# Altium PCB bot_board.PcbDoc
Units mm, origin at the board's own origin, x right, y up, seen from the top; angles counter-clockwise.
Board outline 109 x 70 mm, 4 copper layers (Top Layer, +12V, -12V, Bottom Layer), stack 0.603 mm thick; 25 components, 21 nets, 126 pads, 21 vias.
Unrouted connection lines stored in the file: 21.
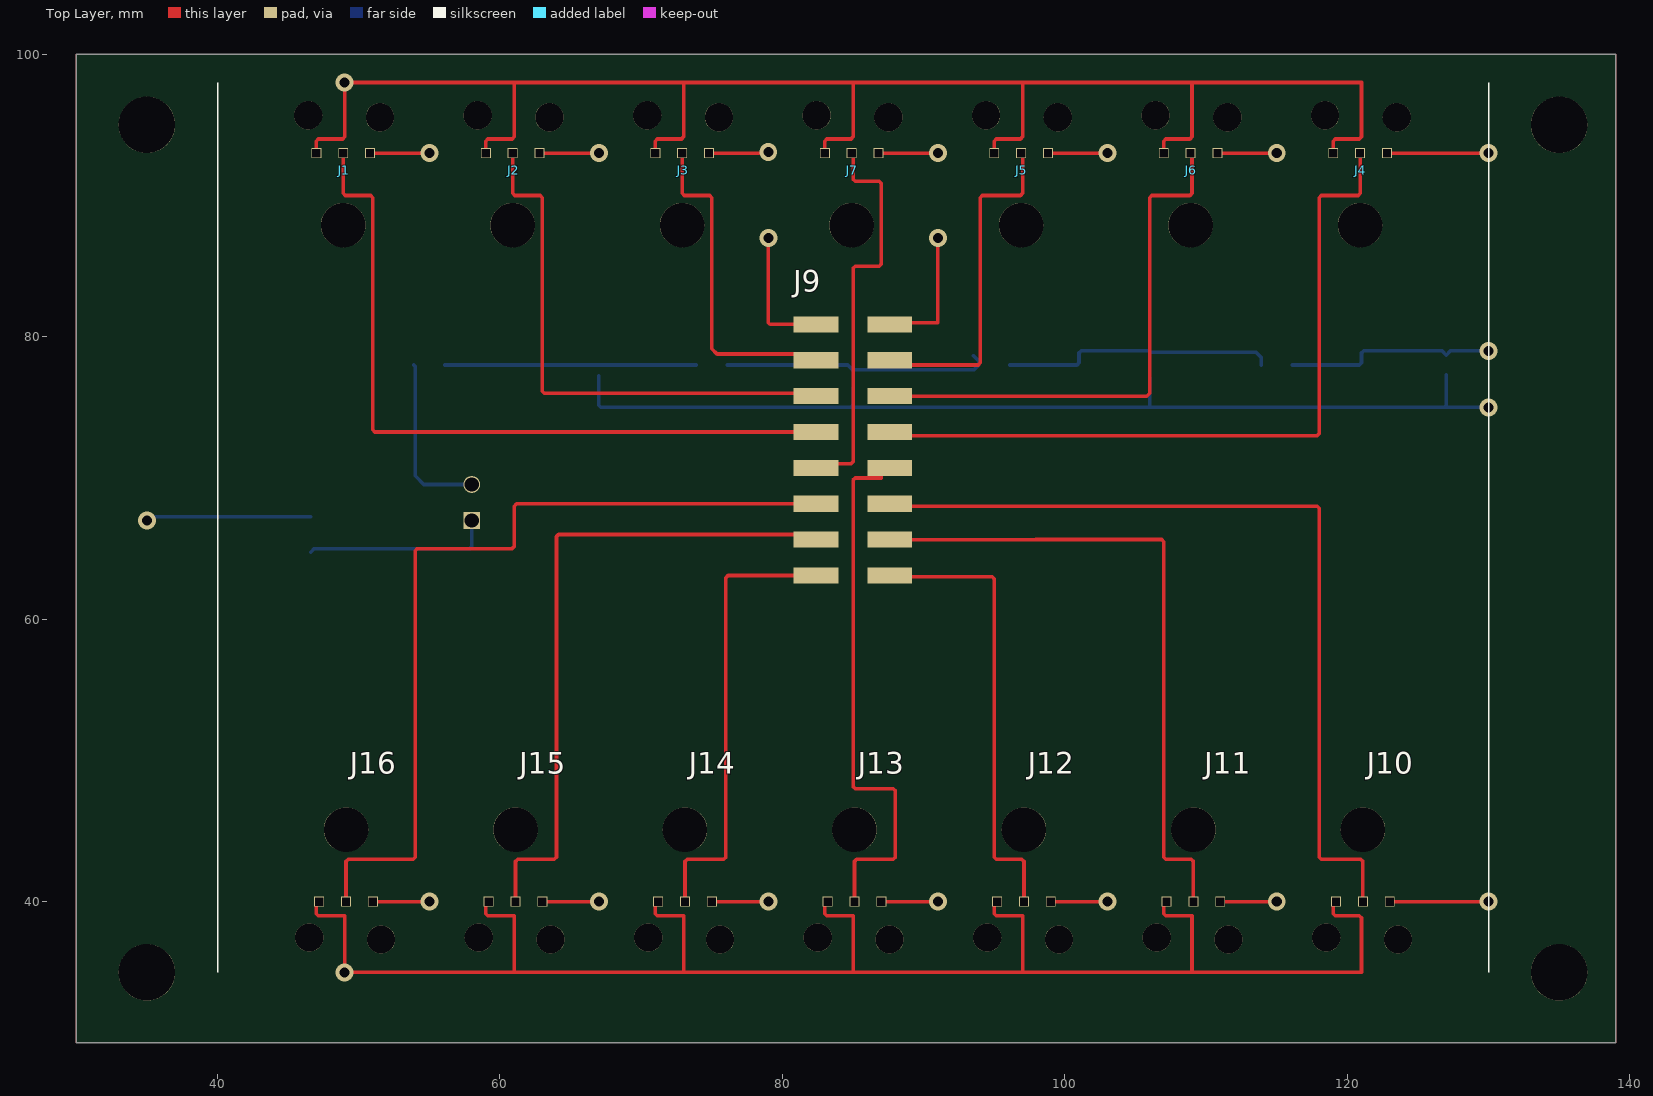
[diagram p0: Top Layer view]
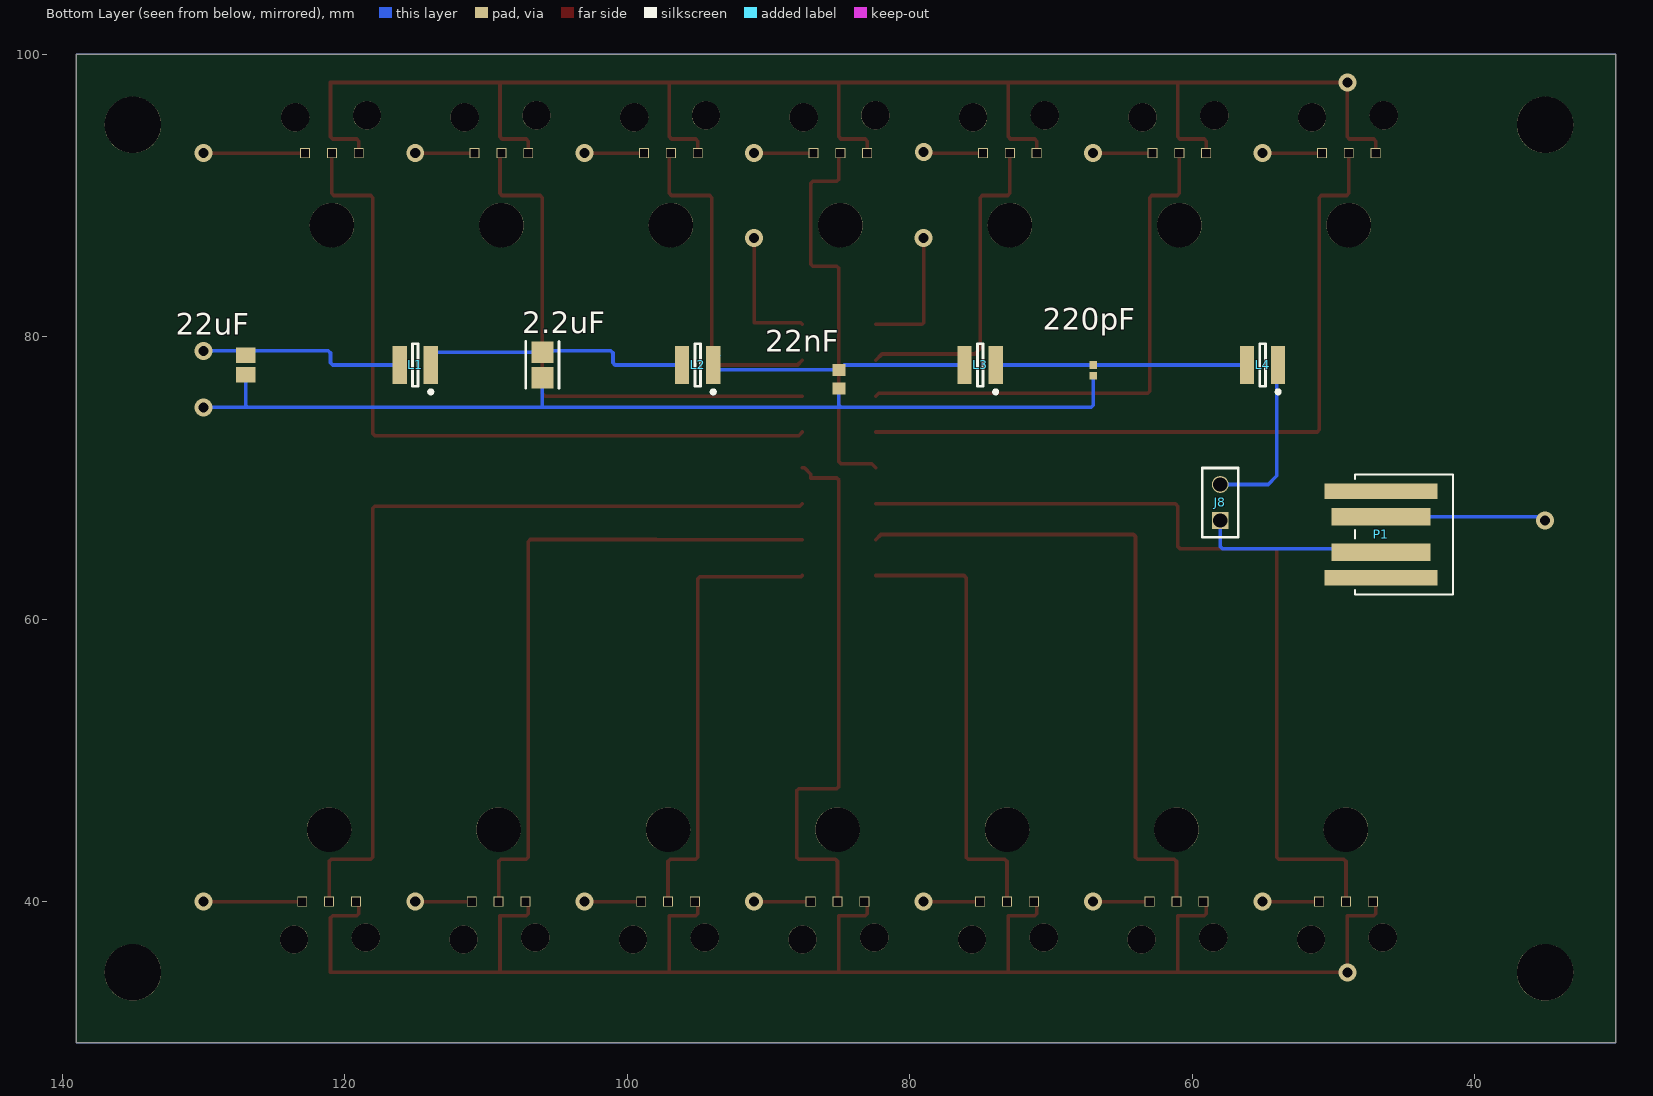
[diagram p1: Bottom Layer view, seen from below]
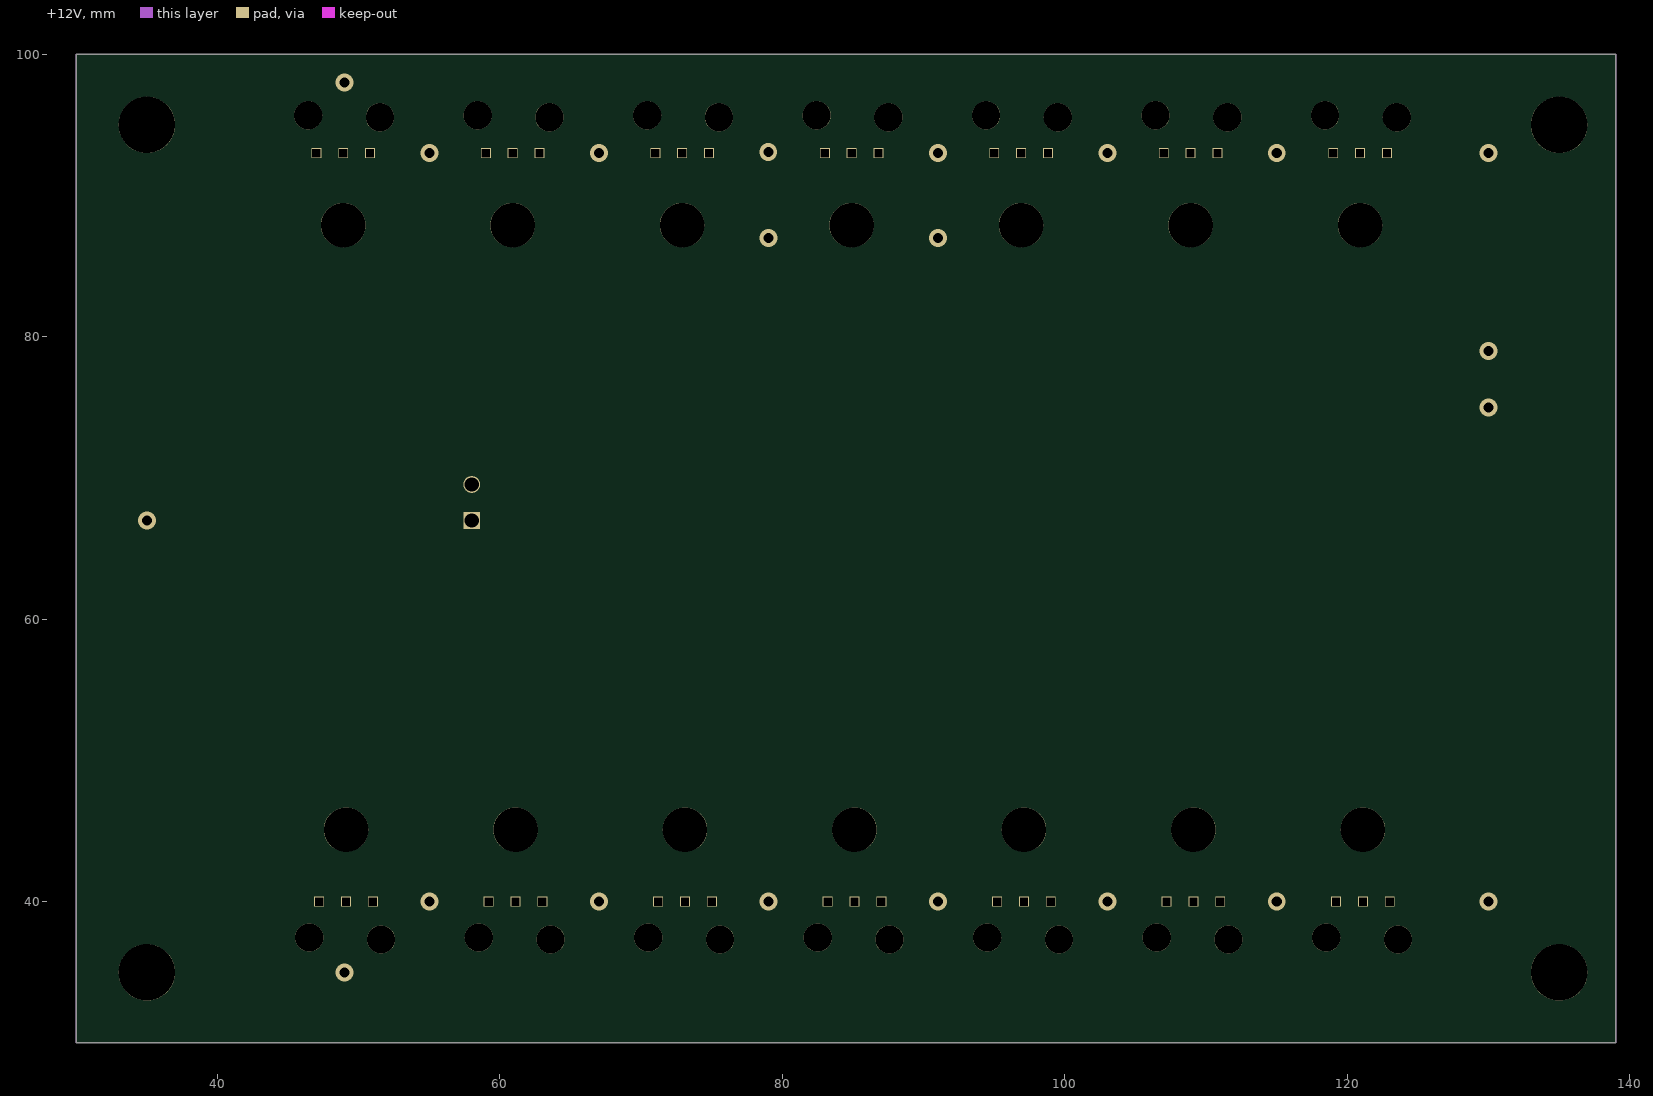
[diagram p2: +12V]
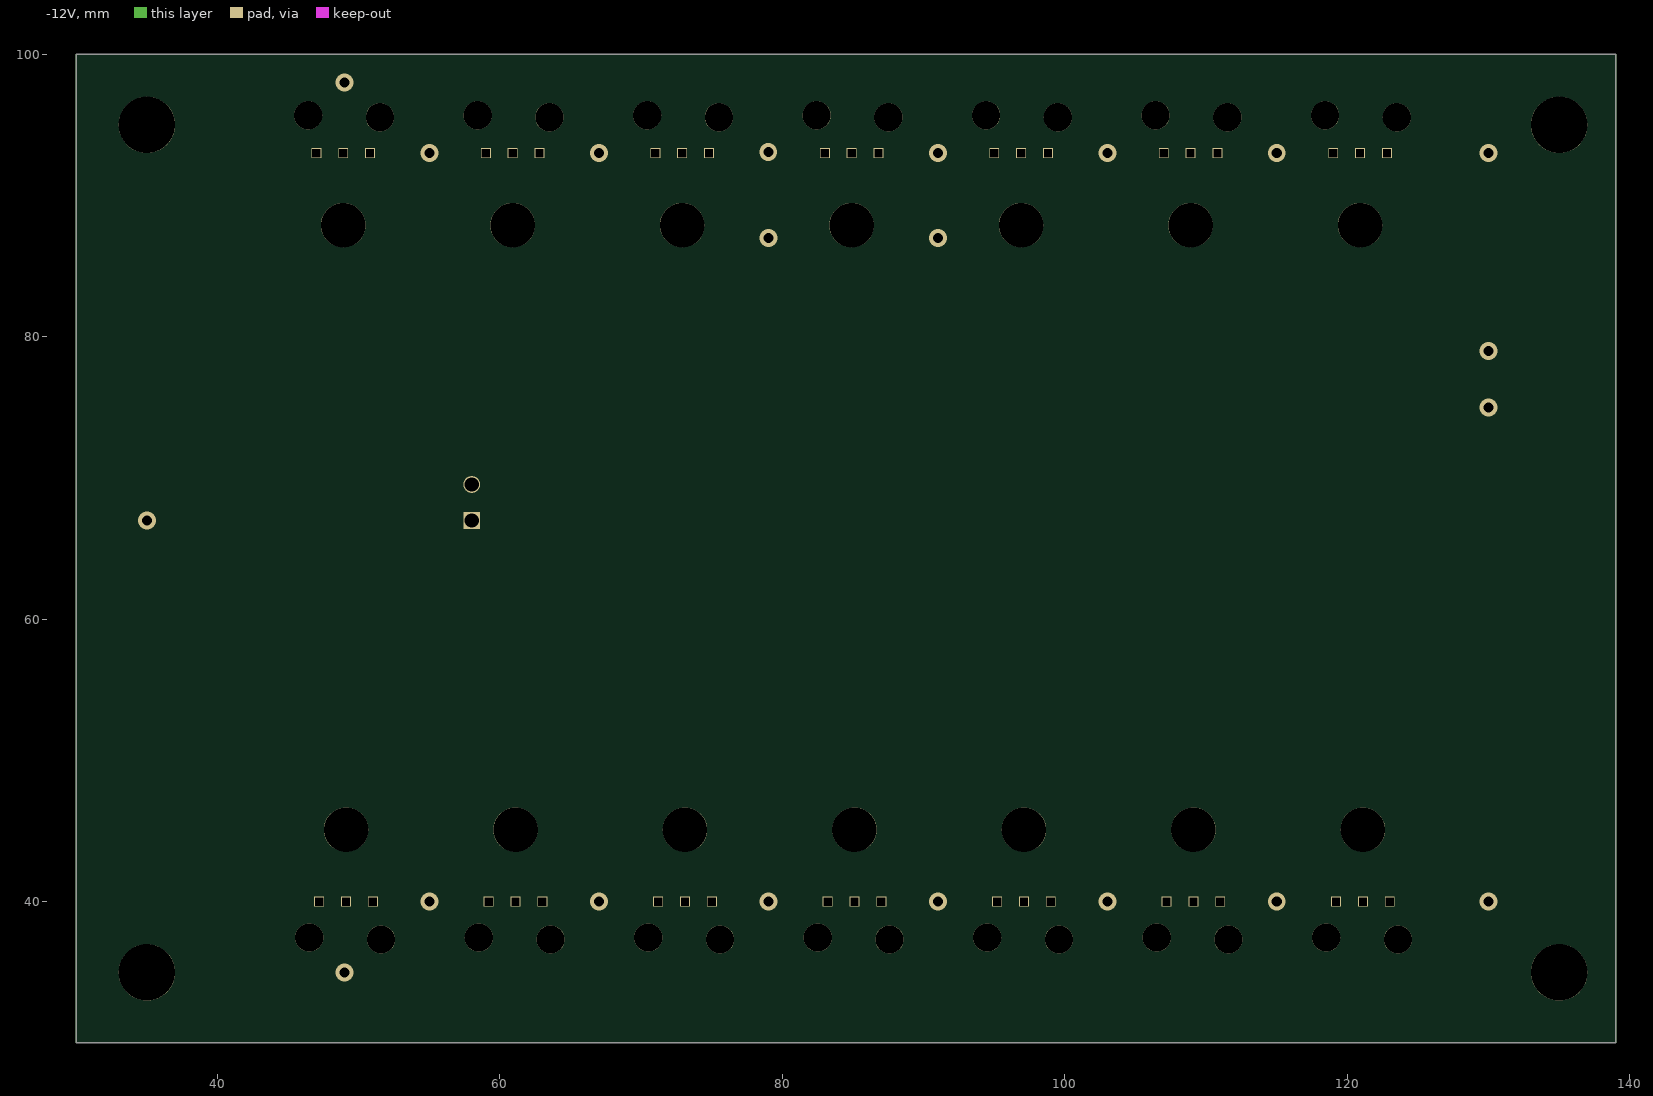
[diagram p3: -12V]
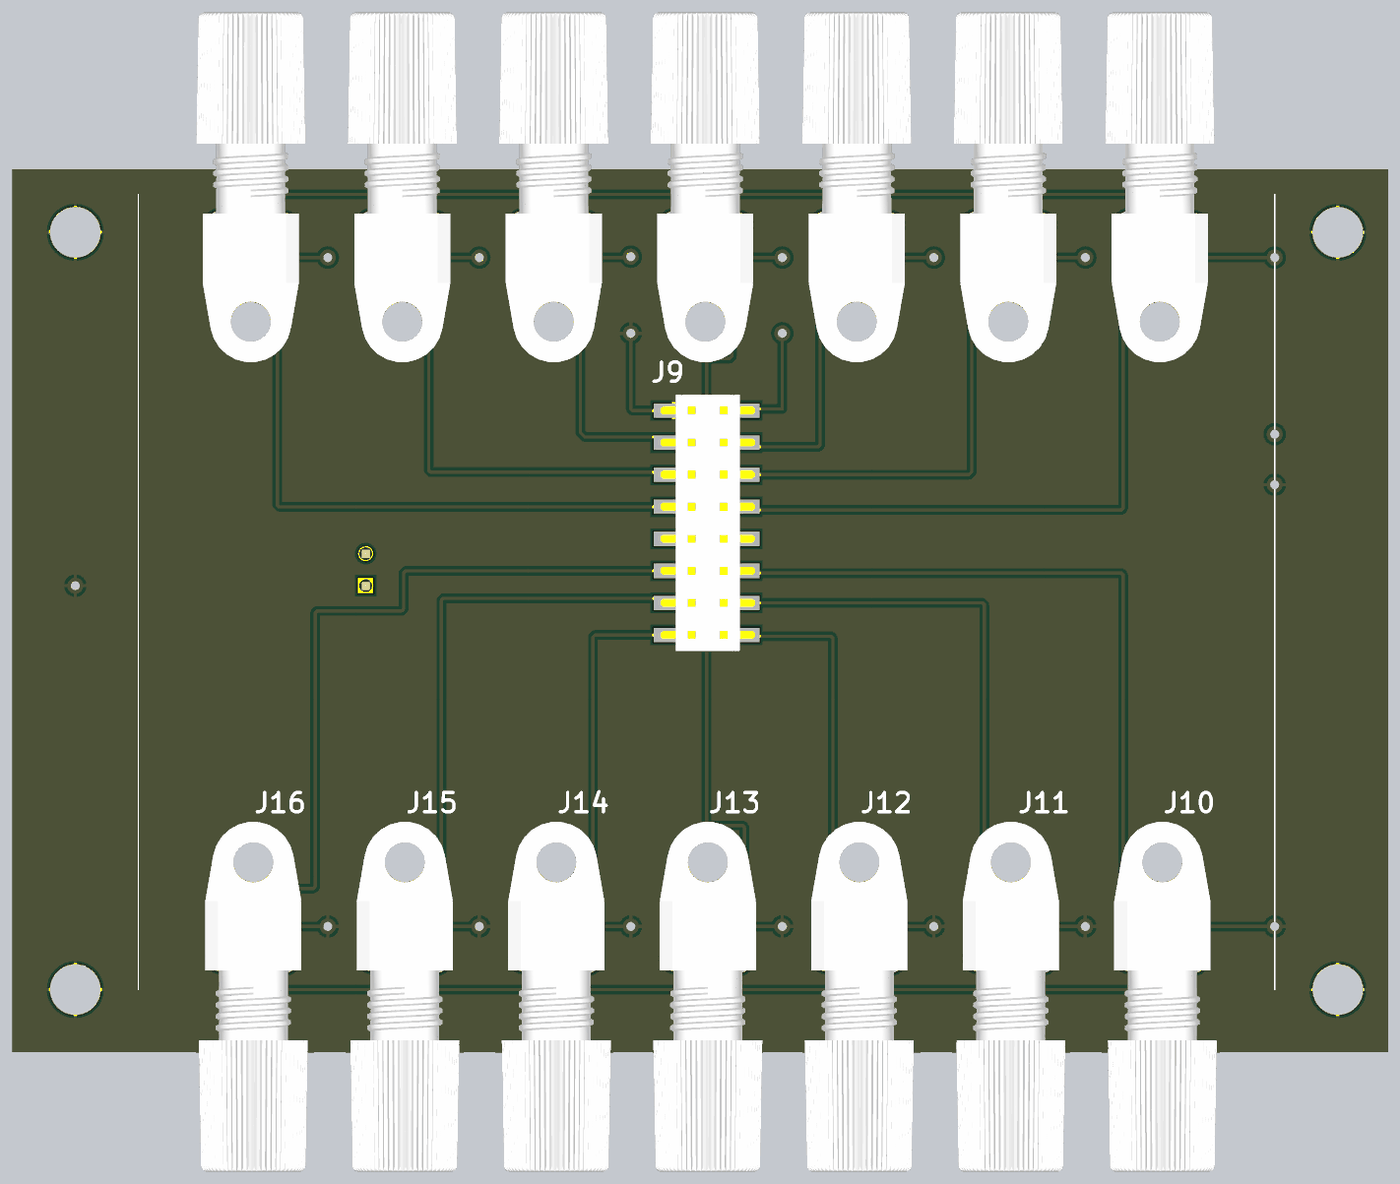
[diagram p4: 3D render of the assembled board from above, using the file's embedded part models]

## Layer stack, top to bottom
Top Solder: solder mask 0.0102, Solder Resist, Dk 3.5
Top Layer: signal copper 0.035
Dielectric 2: prepreg 0.0711, PP-006, Dk 4.1
+12V: signal copper 0.0356
Dielectric 1: dielectric 0.32, FR-4, Dk 4.8
-12V: signal copper 0.0356
Dielectric 3: prepreg 0.0711, PP-006, Dk 4.1
Bottom Layer: signal copper 0.035
Bottom Solder: solder mask 0.0102, Solder Resist, Dk 3.5

## Board outline
30,30 30,100 139,100 139,30

## Design rules (kind name [scope] priority, off if disabled: settings)
Clearance [All] p1: gap=0.254 ignorepadtopadclearanceinfootprint=FALSE except(0: Arc-Hole Track-Hole SMDPad-Hole THPad-Hole Via-Hole Fill-Hole Poly-Hole Region-Hole Text-Hole; 0.2: Arc-SMDPad Track-SMDPad SMDPad-SMDPad)
HoleSize [All] p1: absolutevalues=TRUE maxlimit=4 minlimit=0.025 maxpercent=80.000 minpercent=20.000
MinimumSolderMaskSliver [All] p1: minsoldermaskwidth=0.09
PolygonConnect [All] p1: connectstyle=Relief reliefconductorwidth=0.254 reliefentries=4 polygonreliefangle="90 Angle" airgapwidth=0.254
RoomDefinition bot_schem [InComponentClass('bot_schem')] p1: confinementstyle=ConfineIn formatcopy=TRUE lockcomponents=FALSE outline 30,17 139,17 139,117 30,117
RoutingVias [All] p1: holewidth=0.711 width=1.27 viastyle="Through Hole" minholewidth=0.711 minwidth=1.27 maxholewidth=0.711 maxwidth=1.27
SolderMaskExpansion [All] p1: expansion=0.102 istentingtop=FALSE
Width [All] p1: maxlimit=0.254 minlimit=0.254 preferedwidth=0.254
28 further rules are at their usual default settings.

## Components (designator, comment, footprint, x,y, rotation, side; value= is the part's Value field where it differs from the comment)
2.2uF "C0805C223K5RACTU" 22nF 106,78 r270 bottom (schematic designator 2.2nF)
22nF "C0603C225K4PACTU" 2.2uF 85,77 r270 bottom
22uF "C0805C226M9PACTU" 22uF 127,78 r270 bottom
220pF "C0402C221K5RACTU" 220pF 67,77.62 r270 bottom
J1 "IF-D95T" IF-D95 47,93 r0 top
J2 "IF-D95T" IF-D95 59,93 r0 top
J3 "IF-D95T" IF-D95 71,93 r0 top
J4 "IF-D95T" IF-D95 119,93 r0 top
J5 "IF-D95T" IF-D95 95,93 r0 top
J6 "IF-D95T" IF-D95 107,93 r0 top
J7 "IF-D95T" IF-D95 83,93 r0 top
J8 "PRPC001DFAN-RC" PRPC001DFAN-RC 58,67 r90 bottom
J9 "HW-08-10-F-D-457-SM" "16 PIN RECEIVER" 87.593,63.095 r90 top
J10 "IF-D95T" IF-D95 123,40 r180 top
J11 "IF-D95T" IF-D95 111,40 r180 top
J12 "IF-D95T" IF-D95 99,40 r180 top
J13 "IF-D95T" IF-D95 87,40 r180 top
J14 "IF-D95T" IF-D95 75,40 r180 top
J15 "IF-D95T" IF-D95 63,40 r180 top
J16 "IF-D95T" IF-D95 51,40 r180 top
L1 "SRN3015-1R0Y" 1uH 115,78 r0 bottom
L2 "SRN3015-1R0Y" 1uH 95,78 r0 bottom
L3 "SRN3015-1R0Y" 1uH 75,78 r0 bottom
L4 "SRN3015-1R0Y" 1uH 55,78 r0 bottom
P1 "1054311102" CONN_1054311102_MOL 45,66 r270 bottom

## Footprints (in the part's own frame and the unit in brackets; to place one, negate y for a bottom-side part, rotate by r counter-clockwise, add the part's x,y. Pads: shape width x height; smd on the part's side, far side on the other; paste and mask are expansions set on the pad)
1uH [mm]
  rect 1x2.7 smd: 1(-1.1,0) 2(1.1,0)
  silkscreen extent -1.22,-1.5 0.2,2.02, body extent -1.5,-1.5 1.5,1.5, height 1.5
2.2uF [mm]
  rect 0.85x0.9 smd: 1(-0.65,0) 2(0.65,0)
  body extent -0.88,-0.48 0.87,0.48, height 0.9
"16 PIN RECEIVER" [mm]
  rect 1.14x3.175 smd: 01(0,0) 02(0,5.205) 03(2.54,0) 04(2.54,5.205) 05(5.08,0) 06(5.08,5.205) 07(7.62,0) 08(7.62,5.205) 09(10.16,0) 10(10.16,5.205) 11(12.7,0) 12(12.7,5.205) 13(15.24,0) 14(15.24,5.205) 15(17.78,0) 16(17.78,5.205)
  body extent -1.26,-1.25 19.06,6.25, height 19.44
22nF [mm]
  rect 1.505x1.556 smd paste+0 mask+0: 1(-0.901,0) 2(0.901,0)
  silkscreen extent -1.65,-1.18 1.65,1.18, body extent -1,-0.63 1,0.62, height 0.88
22uF [mm]
  rect 1.1x1.35 smd: 1(-0.7,0) 2(0.7,0)
  body extent -1.1,-0.72 1.1,0.72, height 1.45
220pF [mm]
  rect 0.56x0.52 smd: 1(-0.38,0) 2(0.38,0)
  body extent -0.53,-0.28 0.53,0.28, height 0.6
CONN_1054311102_MOL [mil]
  rect 49x276 smd paste+0 mask+0: 1(49.21,-63.38) 2(-49.21,-63.38)
  rect 43x315 smd: 3(-120.28,-63.38) 4(120.28,-63.38)
  silkscreen extent -167,-137 167,137, body extent -162,-254 162,71, height 440
IF-D95 [mm]
  rect 0.7x0.7 hole 0.55 square: 1(0,0) 2(1.9,0) 3(3.8,0)
  round 2 hole 2: 4(-0.58,2.675) 4(4.5,2.54)
  round 3.15 hole 3.15: 4(1.9,-5.1)
  body extent -2.42,-8.3 6.22,19.44, height 11.3
PRPC001DFAN-RC [mm]
  rect 1.2x1.2 hole 1: 1(0,0)
  round 1.2 hole 1: 2(2.54,0)
  silkscreen extent -1.2,-1.27 3.7,1.27, body extent -1.29,-1.27 3.79,1.27, height 10.17

## Part data
2.2uF: "KEMET - C0805C223K5RACTU - CAP, MLCC, X7R, 22NF, 50V, 0805", Capacitance=22nF, Case Code (Imperial)=0805, Case Code (Metric)=2012, Dielectric=X7R, Dielectric Material=Ceramic, Manufacturer=KEMET, Max Operating Temperature=125°C, Min Operating Temperature=-55°C, Supplier Part Number 1=399-1163-1-ND, Tolerance=10%, Voltage=50V, Case/Package=0805, Category="Ceramic Capacitors", ComponentLink1Description=https://datasheet.ciiva.com/18193/getdatasheetpartid-385695-18193669.pdf?src-supplier=Verical, ComponentLink1URL=https://datasheet.ciiva.com/18193/getdatasheetpartid-385695-18193669.pdf?src-supplier=Verical, Construction=Flat, Depth=1.25mm, Height=0.78mm, Length=2mm, Manufacturer Part Number=C0805C223K5RACTU, Mount="Surface Mount,PCB", Packaging="Tape and Reel", Pricing 1="1=0.10000, 10=0.05200, 50=0.02840, 100=0.02320, 500=0.01656, 1000=0.01301 (USD)", Radiation Hardening=No, REACH SVHC="No SVHC", RoHS=Yes, RoHS Compliant=Yes, Series=C0805C, Stock 1=179680, Supplier 1=Digi-Key, Termination=SMD/SMT, Voltage Rating=50V, Voltage Rating (DC)=50V, Weight=0.000194oz, Width=1.2mm
22nF: "KEMET - C0603C225K4PACTU - CAP, MLCC, X5R, 2.2UF, 16V, 0603", Capacitance=2.2uF, Case Code (Imperial)=0603, Case Code (Metric)=1608, Dielectric=X5R, Dielectric Material=Ceramic, Manufacturer=KEMET, Max Operating Temperature=85°C, Min Operating Temperature=-55°C, Package Quantity=1, Supplier Part Number 1=399-7886-1-ND, Tolerance=10%, Voltage=16V, Case/Package=0603, Category="Ceramic Capacitors", ComponentLink1Description=https://datasheet.ciiva.com/5969/1776083-5969304.pdf?src-supplier=Farnell, ComponentLink1URL=https://datasheet.ciiva.com/5969/1776083-5969304.pdf?src-supplier=Farnell, ComponentLink2Description=https://datasheet.ciiva.com/7823/1776083-7823706.pdf?src-supplier=Element14, ComponentLink2URL=https://datasheet.ciiva.com/7823/1776083-7823706.pdf?src-supplier=Element14, Construction=Flat, Contact Plating=Tin,Matte, Depth=0.8mm, Dissipation Factor=5%, Height=0.8mm, Lead Free="Lead Free", Length=1.6mm, Manufacturer Part Number=C0603C225K4PACTU, Mount="Surface Mount", Number of Pins=2, Packaging="Tape and Reel", Pricing 1="1=0.13000, 10=0.09000, 50=0.05080, 100=0.04210, 500=0.02952, 1000=0.02444 (USD)", Radiation Hardening=No, REACH SVHC="No SVHC", RoHS=Yes, RoHS Compliant=Yes, Series=C, Stock 1=161677, Supplier 1=Digi-Key, Termination=SMD/SMT, Thickness=0.034inch, Voltage Rating=16V, Voltage Rating (DC)=16V, Width=0.8mm
22uF: "KEMET         C0805C226M9PACTU            CERAMIC CAPACITOR, 22UF, 6.3V, X5R, 20%, 0805, FULL REEL", Capacitance=22uF, Case Code (Imperial)=0805, Case Code (Metric)=2012, Dielectric=X5R, Dielectric Material=Ceramic, Manufacturer=KEMET, Max Operating Temperature=85°C, Min Operating Temperature=-55°C, Package Quantity=2500, Supplier Part Number 1=399-4696-1-ND, Tolerance=20%, Voltage=6.3V, Case/Package=0805, Category="Ceramic Capacitors", ComponentLink1Description=https://datasheet.ciiva.com/7842/40889-7842585.pdf?src-supplier=Element14, ComponentLink1URL=https://datasheet.ciiva.com/7842/40889-7842585.pdf?src-supplier=Element14, ComponentLink2Description=https://datasheet.ciiva.com/18193/getdatasheetpartid-344134-18193702.pdf?src-supplier=Verical, ComponentLink2URL=https://datasheet.ciiva.com/18193/getdatasheetpartid-344134-18193702.pdf?src-supplier=Verical, ComponentLink3Description=https://datasheet.ciiva.com/22748/1918694-22748303.pdf?src-supplier=Element14, ComponentLink3URL=https://datasheet.ciiva.com/22748/1918694-22748303.pdf?src-supplier=Element14, Construction=Flat, Depth=1.25mm, Dissipation Factor=5%, Height=1.25mm, Lead Free="Lead Free", Length=2mm, Manufacturer Part Number=C0805C226M9PACTU, Mount="Surface Mount,PCB", Number of Pins=2, Packaging="Tape and Reel", Pricing 1="1=0.21000, 10=0.14400, 50=0.08660, 100=0.07320, 500=0.05004, 1000=0.04428 (USD)", Radiation Hardening=No, REACH SVHC="No SVHC", RoHS=Yes, RoHS Compliant=Yes, Stock 1=337605, Supplier 1=Digi-Key, Termination=SMD/SMT, Voltage Rating=6.3V, Voltage Rating (DC)=6.3V, Width=1.2mm
220pF: "KEMET - C0402C221K5RACTU - SMD Multilayer Ceramic Capacitor, 220 pF, 50 V, 0402 [1005 Metric], ± 10%, X7R, C Series KEMET", Capacitance=220pF, Case Code (Imperial)=0402, Case Code (Metric)=1005, Dielectric=X7R, Dielectric Material=Ceramic, Manufacturer=KEMET, Max Operating Temperature=125°C, Min Operating Temperature=-55°C, Package Quantity=1, Supplier Part Number 1=399-1030-1-ND, Tolerance=10%, Voltage=50V, Case/Package=0402, Category="Ceramic Capacitors", ComponentLink1Description=https://datasheet.ciiva.com/7747/1807957-7747493.pdf?src-supplier=Element14, ComponentLink1URL=https://datasheet.ciiva.com/7747/1807957-7747493.pdf?src-supplier=Element14, ComponentLink2Description=https://datasheet.ciiva.com/5969/kem-c1002-x7r-smd-5969768.pdf?src-supplier=Farnell, ComponentLink2URL=https://datasheet.ciiva.com/5969/kem-c1002-x7r-smd-5969768.pdf?src-supplier=Farnell, ComponentLink3Description=https://datasheet.ciiva.com/14609/70095383-14609163.pdf?src-supplier=Allied+Electronics, ComponentLink3URL=https://datasheet.ciiva.com/14609/70095383-14609163.pdf?src-supplier=Allied+Electronics, ComponentLink4Description=https://datasheet.ciiva.com/28645/1851736-28645422.pdf?src-supplier=Element14, ComponentLink4URL=https://datasheet.ciiva.com/28645/1851736-28645422.pdf?src-supplier=Element14, Construction=Flat, Contact Plating=Tin,Matte, Depth=0.5mm, Dissipation Factor=2.5%, Height=0.5mm, Lead Pitch=0.3mm, Length=1mm, Manufacturer Part Number=C0402C221K5RACTU, Mount="Surface Mount,PCB", Number of Pins=2, Packaging="Tape and Reel", Pricing 1="1=0.10000, 10=0.03600, 50=0.01980, 100=0.01620, 500=0.01156, 1000=0.00908, 2500=0.00825, 5000=0.00759 (USD)", Radiation Hardening=No, REACH SVHC="No SVHC", RoHS=Yes, RoHS Compliant=Yes, Series=C, Stock 1=199654, Supplier 1=Digi-Key, Termination=SMD/SMT, Thickness=0.022inch, Voltage Rating=50V, Voltage Rating (DC)=50V, Weight=2.3E-05oz, Width=0.5mm
J1 J2 J3 J4 J5 J6 J7 J10 J11 J12 J13 J14 J15 J16: "DETECTOR PHOTOLOGIC TTL/CMOS", Manufacturer="Industrial Fiber Optics", Operating Supply Current=6mA, Package Quantity=50, Supplier Part Number 1=FB123-ND, Category="Fiber Optic Cables", ComponentLink1Description=https://datasheet.ciiva.com/2106/ifd95-2106550.pdf?src-supplier=Digi-Key, ComponentLink1URL=https://datasheet.ciiva.com/2106/ifd95-2106550.pdf?src-supplier=Digi-Key, Data Rate=125Kbps, Lead Free="Contains Lead", Manufacturer Part Number=IF-D95T, Rise Time=70ns, RoHS=No, Supplier 1=Digi-Key
J8: "Conn Header Vert 2POS", Color=Black, Manufacturer=Sullins, Package Quantity=1, Supplier Part Number 1=S2211EC-01-ND, Category=Connectors, ComponentLink1Description=https://datasheet.ciiva.com/741/xrxczzzdxxn-rc-11636-b-741404.pdf?src-supplier=Digi-Key, ComponentLink1URL=https://datasheet.ciiva.com/741/xrxczzzdxxn-rc-11636-b-741404.pdf?src-supplier=Digi-Key, Connector Type="Male Pin", Contact Mating Length=0.318inch, Contact Plating=Gold, Manufacturer Part Number=PRPC001DFAN-RC, Mount="Through Hole", Number of Positions=2, Number of Rows=2, Packaging=Bulk, Pricing 1="1=0.09000, 10=0.08300, 25=0.06160, 50=0.05280, 100=0.05110, 250=0.04404, 500=0.04226 (USD)", RoHS=Yes, Row Spacing=0.1inch, Stock 1=5964, Supplier 1=Digi-Key, Termination=Solder
L1 L2 L3 L4: "INDUCTOR, POWER, 1UH, SEMI SHIELDED", Case/Package=1212, Current Rating=2.35A, DC Resistance (DCR)=48mR, Frequency=145MHz, Inductance=1uH, Inductance Tolerance=30%, Manufacturer=Bourns, Max Operating Temperature=125°C, Min Operating Temperature=-40°C, Package Quantity=2000, Resistor Type=Wirewound, Supplier Part Number 1=SRN3015-1R0YCT-ND, Test Frequency=1MHz, Category="Fixed Inductors", ComponentLink1Description=https://datasheet.ciiva.com/11802/0900766b80fe1f40-11802588.pdf?src-supplier=RSComponents, ComponentLink1URL=https://datasheet.ciiva.com/11802/0900766b80fe1f40-11802588.pdf?src-supplier=RSComponents, ComponentLink2Description=https://datasheet.ciiva.com/16940/70230774-16940935.pdf?src-supplier=Allied+Electronics, ComponentLink2URL=https://datasheet.ciiva.com/16940/70230774-16940935.pdf?src-supplier=Allied+Electronics, ComponentLink3Description=https://datasheet.ciiva.com/1048/srn3015-1048824.pdf?src-supplier=Digi-Key, ComponentLink3URL=https://datasheet.ciiva.com/1048/srn3015-1048824.pdf?src-supplier=Digi-Key, ComponentLink4Description=https://datasheet.ciiva.com/28678/1481208-28678232.pdf?src-supplier=Element14, ComponentLink4URL=https://datasheet.ciiva.com/28678/1481208-28678232.pdf?src-supplier=Element14, ComponentLink5Description=https://datasheet.ciiva.com/30197/587srn3015-30197944.pdf?src-supplier=Onlinecomponents.com, ComponentLink5URL=https://datasheet.ciiva.com/30197/587srn3015-30197944.pdf?src-supplier=Onlinecomponents.com, ComponentLink6Description=https://datasheet.ciiva.com/1048/srn3015-1048825.pdf?src-supplier=Digi-Key, ComponentLink6URL=https://datasheet.ciiva.com/1048/srn3015-1048825.pdf?src-supplier=Digi-Key, ComponentLink7Description=https://datasheet.ciiva.com/1048/srn3015-1048826.pdf?src-supplier=Digi-Key, ComponentLink7URL=https://datasheet.ciiva.com/1048/srn3015-1048826.pdf?src-supplier=Digi-Key, ComponentLink8Description=https://datasheet.ciiva.com/17284/srn3015-17284732.pdf?src-supplier=Avnet+Europe, ComponentLink8URL=https://datasheet.ciiva.com/17284/srn3015-17284732.pdf?src-supplier=Avnet+Europe, ComponentLink9Description=https://datasheet.ciiva.com/8517/srn3015-8517694.pdf?src-supplier=Avnet, ComponentLink9URL=https://datasheet.ciiva.com/8517/srn3015-8517694.pdf?src-supplier=Avnet, ComponentLink10Description=https://datasheet.ciiva.com/5986/srn3015-5986175.pdf?src-supplier=Farnell, ComponentLink10URL=https://datasheet.ciiva.com/5986/srn3015-5986175.pdf?src-supplier=Farnell, ComponentLink11Description=https://datasheet.ciiva.com/7847/srn3015-7847903.pdf?src-supplier=Element14, ComponentLink11URL=https://datasheet.ciiva.com/7847/srn3015-7847903.pdf?src-supplier=Element14, Contact Plating=Tin, Core Material=Ferrite, DC Current=2.35A, Depth=3.1mm, Height=1.5mm, Height - Seated (Max)=0.059inch, Length=3mm, Manufacturer Part Number=SRN3015-1R0Y, Material=Steel, Max DC Current=2.35A, Military Standard=Not, Number of Pins=2, Packaging="Tape and Reel", Pricing 1="1=0.46000, 10=0.40400, 25=0.37520, 50=0.31760, 100=0.28880, 250=0.27144, 500=0.24256, 1000=0.19635 (USD)", REACH SVHC="No SVHC", RMS Current (Irms)=2.35A, RoHS=Yes, RoHS Compliant=Yes, Sample Rate (Hz)=1MHz, Saturation Current=2.35A, Self Resonant Frequency=145MHz, Series=SRN3015, Shielding=Shielded, Stock 1=8610, Supplier 1=Digi-Key, Termination=SMD/SMT, Tolerance=30%, Weight=0.001235oz, Width=3mm
P1: "Nano-Fit Vertical Header, Surface Mount, 2.50mm Pitch, Single Row, 2 Circuits, 0.76 u00B5m Tin (Sn) Plating, Black,...", Manufacturer=Molex, Supplier Part Number 1=WM26073CT-ND, Category=Connectors, Manufacturer Part Number=1054311102, Pricing 1="1=2.05000, 10=1.85700, 100=1.59160 (USD)", RoHS=No, Stock 1=1192, Supplier 1=Digi-Key

## Free pads (board coordinates)
  round 4 hole 4: 1(35,35) 1(35,95) 1(135,35) 1(135,95)

## Via types
v1: diameter 1.27, hole 0.711, Top Layer to Bottom Layer, tented both sides, 21 vias

## Nets (pads, with @x,y where several pads share a name; then routed paths per layer and width w, separated by ;. In a path a pad name is that pad's centre, name@x,y a point inside that pad or via, vN(x,y) a via of type N, cw(c..) or ccw(c..) an arc to the next point about the centre after c; other vN are vias at no path point)
+12V: 22uF.1 J1.3 J2.3 J3.3 J4.3 J5.3 J6.3 J7.3 J9.15 J10.3 J11.3 J12.3 J13.3 J14.3 J15.3 J16.3 L4.2 | length 177.7
  Top Layer w0.254: J16.3 47,39.8 47,39.149 47.149,39 49,39 v1(49,35) 61,35 ; J1.3 v1(55,93) ; J15.3 59,39.8 59,39.149 59.149,39 61,39 61,35 ; J2.3 v1(67,93) ; J14.3 71,39.8 71,39.149 71.149,39 73,39 73,35 ; J3.3 78.927,93 v1(78.997,93.07) ; J13.3 83,39.8 83,39.149 83.149,39 85,39 85,35 ; J7.3 v1(91,93) ; J9.15 87.718,81 91,81 v1(91,87) ; J12.3 95,39.8 95,39.149 95.149,39 97,39 97,35 ; J5.3 v1(103,93) ; J11.3 107,39.8 107,39.149 107.149,39 109,39 109,35 ; J6.3 v1(115,93) ; J10.3 119,39.8 119,39.149 119.149,39 120.851,39 121,38.851 121,35 109,35 ; J4.3 v1(130,93) ; 61,35 73,35 ; 73,35 85,35 ; 85,35 97,35 ; 97,35 109,35
  Bottom Layer w0.254: 116.1,78 120.851,78 121,78.149 121,78.851 121.149,79 126.7,79 22uF.1 127.3,79 v1(130,79)
+Line1: J8.2 L1.1 | length 12.1
  Bottom Layer w0.254: 53.9,78 54,77.9 54,70.149 54.609,69.54 J8.2
+Line2: 220pF.1 L1.2 L2.1 | length 17.8
  Bottom Layer w0.254: 56.1,78 220pF.1 73.893,78 73.9,78.007
+Line3: 22nF.1 L2.2 L3.1 | length 18.9
  Bottom Layer w0.254: 76.1,78 84.625,78 84.975,77.65 22nF.1 93.55,77.65 93.9,78 93.9,78.277 93.527,78.65
+Line4: 2.2uF.1 L3.2 L4.1 | length 19.3
  Bottom Layer w0.254: 96.1,78 100.851,78 101,78.149 101,78.851 101.149,79 105.901,79 2.2uF.1 113.527,78.901 113.9,78.528 113.9,78
CurrentTest: J8.1 P1.1 | length 13.4
  Bottom Layer w0.254: P1.1 46.86,65 57.851,65 58,65.149 J8.1
DIG_1: J9.11 J12.2 | length 32.3
  Top Layer w0.254: 87.593,63.095 87.688,63 94.851,63 95,62.851 95,43.149 95.149,43 96.951,43 97.1,42.851 J12.2
DIG_2: J9.14 J14.2 | length 32.1
  Top Layer w0.254: J14.2 73.1,42.851 73.249,43 75.851,43 76,43.149 76,62.946 76.149,63.095 82.388,63.095
DIG_3: J9.09 J11.2 | length 46.9
  Top Layer w0.254: 87.593,65.635 97.949,65.635 97.955,65.641 106.851,65.641 107,65.492 107,43.149 107.149,43 108.951,43 109.1,42.851 J11.2
DIG_4: J9.12 J15.2 | length 47.2
  Top Layer w0.254: J15.2 61.1,42.851 61.249,43 63.851,43 64,43.149 64,65.851 64.149,66 82.023,66 82.388,65.635
DIG_5: J9.07 J10.2 | length 61.3
  Top Layer w0.254: 87.593,68.175 87.768,68 117.851,68 118,67.851 118,43.149 118.149,43 120.951,43 121.1,42.851 J10.2
DIG_6: J9.10 J16.2 | length 61
  Top Layer w0.254: J16.2 49.1,42.851 49.249,43 53.851,43 54,43.149 54,64.851 54.149,65 60.851,65 61,65.149 61,68 61.175,68.175 82.388,68.175
DIG_7: J9.13 J13.2 | length 38.5
  Top Layer w0.254: J13.2 85.1,42.851 85.249,43 87.851,43 88,43.149 88,47.851 87.851,48 85.149,48 85,48.149 85,69.851 85.149,70 87,70 87,70.272 87.443,70.715 87.593,70.715
DIG_8: J7.2 J9.08 | length 28.3
  Top Layer w0.254: J9.08 82.673,71 84.851,71 85,71.149 85,84.851 85.149,85 86.851,85 87,85.149 87,90.851 86.851,91 85.149,91 85,91.149 85,92.9 J7.2
DIG_9: J4.2 J9.02 | length 53.2
  Top Layer w0.254: 87.593,73.255 87.848,73 117.851,73 118,73.149 118,89.851 118.149,90 120.751,90 120.9,90.149 J4.2
DIG_10: J1.2 J9.05 | length 53
  Top Layer w0.254: J1.2 48.9,90.149 49.049,90 50.851,90 51,89.851 51,73.404 51.149,73.255 82.388,73.255
DIG_11: J6.2 J9.06 | length 38.4
  Top Layer w0.254: 87.593,75.795 105.795,75.795 106,76 106,89.851 106.149,90 108.851,90 109,90.149 109,92.9 J6.2
DIG_12: J2.2 J9.03 | length 38.3
  Top Layer w0.254: J2.2 60.9,90.149 61.049,90 62.851,90 63,89.851 63,76.149 63.149,76 82.183,76 82.388,75.795
DIG_13: J5.2 J9.04 | length 24.3
  Top Layer w0.254: 87.593,78.335 87.928,78 93.851,78 94,78.149 94,89.851 94.149,90 96.851,90 97,90.149 97,92.9 J5.2
DIG_14: J3.2 J9.01 | length 23.5
  Top Layer w0.254: J3.2 72.9,90.149 73.049,90 74.851,90 75,89.851 75,79.149 75.371,78.778 81.945,78.778 82.388,78.335
GND: 2.2uF.2 22nF.2 22uF.2 220pF.2 J1.1 J2.1 J3.1 J4.1 J5.1 J6.1 J7.1 J9.16 J10.1 J11.1 J12.1 J13.1 J14.1 J15.1 J16.1 P1.2 pad.1 | length 243
  Top Layer w0.254: J1.1 47,93.851 47.149,94 48.851,94 49,94.149 v1(49,98) 61,98 ; J16.1 v1(55,40) ; J2.1 59,93.851 59.149,94 60.851,94 61,94.149 61,98 ; J15.1 v1(67,40) ; J3.1 71,93.851 71.149,94 72.851,94 73,94.149 73,98 ; J14.1 v1(79,40) ; v1(79,87) 79,81 79.125,80.875 J9.16 ; J7.1 83,93.851 83.149,94 84.851,94 85,94.149 85,98 ; J13.1 v1(91,40) ; J5.1 95,93.851 95.149,94 96.851,94 97,94.149 97,98 ; J12.1 v1(103,40) ; J6.1 107,93.851 107.149,94 108.851,94 109,94.149 109,98 ; J11.1 v1(115,40) ; J4.1 119,93.851 119.149,94 120.851,94 121,94.149 121,98 109,98 ; J10.1 v1(130,40) ; 61,98 73,98 ; 73,98 85,98 ; 85,98 97,98 ; 97,98 109,98
  Bottom Layer w0.254: v1(35,67) 35.25,67.25 P1.2 ; 220pF.2 67,75.149 67.149,75 84.851,75 ; 22nF.2 85,75.149 84.851,75 ; 2.2uF.2 106,75 ; 22uF.2 127,75.149 126.851,75 ; v1(130,75) 126.851,75 ; 84.851,75 106,75 ; 106,75 126.851,75
pads on no net: J1.4 J2.4 J3.4 J4.4 J5.4 J6.4 J7.4 J10.4 J11.4 J12.4 J13.4 J14.4 J15.4 J16.4 P1.3 P1.4

## Polygon pours and split planes (outlines as drawn)
GND on -12V "-12V" (solid, shelved, pour order 0): 30,30 30,100 139,100 139,30
+12V on +12V "+12V" (solid, shelved, pour order 1): 30,30 30,100 139,100 139,30
GND on Bottom Layer "GND" (solid, shelved, pour order 3): 30,30 30,100 139,100 139,30
GND on Top Layer "GND" (solid, shelved, pour order 2): 30,30 30,100 139,100 139,30

## Silkscreen, mask and mechanical layers (free items; w line width, h text height)
Top Overlay:
  lines w0.1: 40,35 40,98 ; 130,35 130,98

## Text inside footprints (layer, text, board x,y; h text height)
J9: Mechanical 30 "2.000" at 94.703,44.528 h0.39 r90; Mechanical 30 "2.000" at 90.322,43.956 h0.39 r90; Mechanical 30 "4.000" at 90.322,42.191 h0.39 r90; Mechanical 30 "14.000" at 95.783,53.405 h0.39 r90; Mechanical 30 "16.307" at 85.953,53.405 h0.39 r90; Mechanical 3 "1" at 89.831,44.236 h1.97 r90; Mechanical 3 "2" at 91.83,44.236 h1.97 r90; Mechanical 3 "15" at 89.831,63.144 h1.97 r90; Mechanical 3 "16" at 91.83,63.144 h1.97 r90
P1: Mechanical 7 "0.263in/6.68mm" at 45.317,87.153 h0.64 r90; Mechanical 7 "0.195in/4.95mm" at 44.452,88.423 h0.64 r90; Mechanical 7 "0in/0mm" at 46.927,77.945 h0.64 r90; Mechanical 7 "0in/0mm" at 46.927,58.837 h0.64 r90; Mechanical 7 "0.324in/8.23mm" at 30.738,68.223 h0.64 r90; Mechanical 7 "0.241in/6.11mm" at 33.278,68.223 h0.64 r90; Mechanical 7 "0.098in/2.5mm" at 38.993,66.189 h0.64 r90; Mechanical 7 "Alt Padstyle 2: b229_152h76" at 67.514,74.573 h1.27 r90; Mechanical 7 "Alt Padstyle 1: b152_229h76" at 65.609,74.573 h1.27 r90; Mechanical 7 "Right Mtg Padstyle: c152h76" at 63.704,74.573 h1.27 r90; Mechanical 7 "Left Mtg Padstyle: c152h76" at 61.799,74.255 h1.27 r90; Mechanical 7 "3rd Mtg Padstyle: c178h178" at 59.894,74.255 h1.27 r90; Mechanical 7 "2nd Mtg Padstyle: c178h178" at 57.989,74.255 h1.27 r90; Mechanical 7 "1st Mtg Padstyle: r800_109" at 56.084,74.255 h1.27 r90; Mechanical 7 "Default Padstyle: r124_701" at 54.179,74.255 h1.27 r90